# Altium PCB balancer.PcbDoc (part 1 of 2)
Units mil, origin at the board's own origin, x right, y up, seen from the top; angles counter-clockwise.
Board outline 6000 x 4000 mil, 2 copper layers (Top Layer, Bottom Layer); 234 components, 201 nets, 774 pads, 0 vias.
Unrouted connection lines stored in the file: 537.
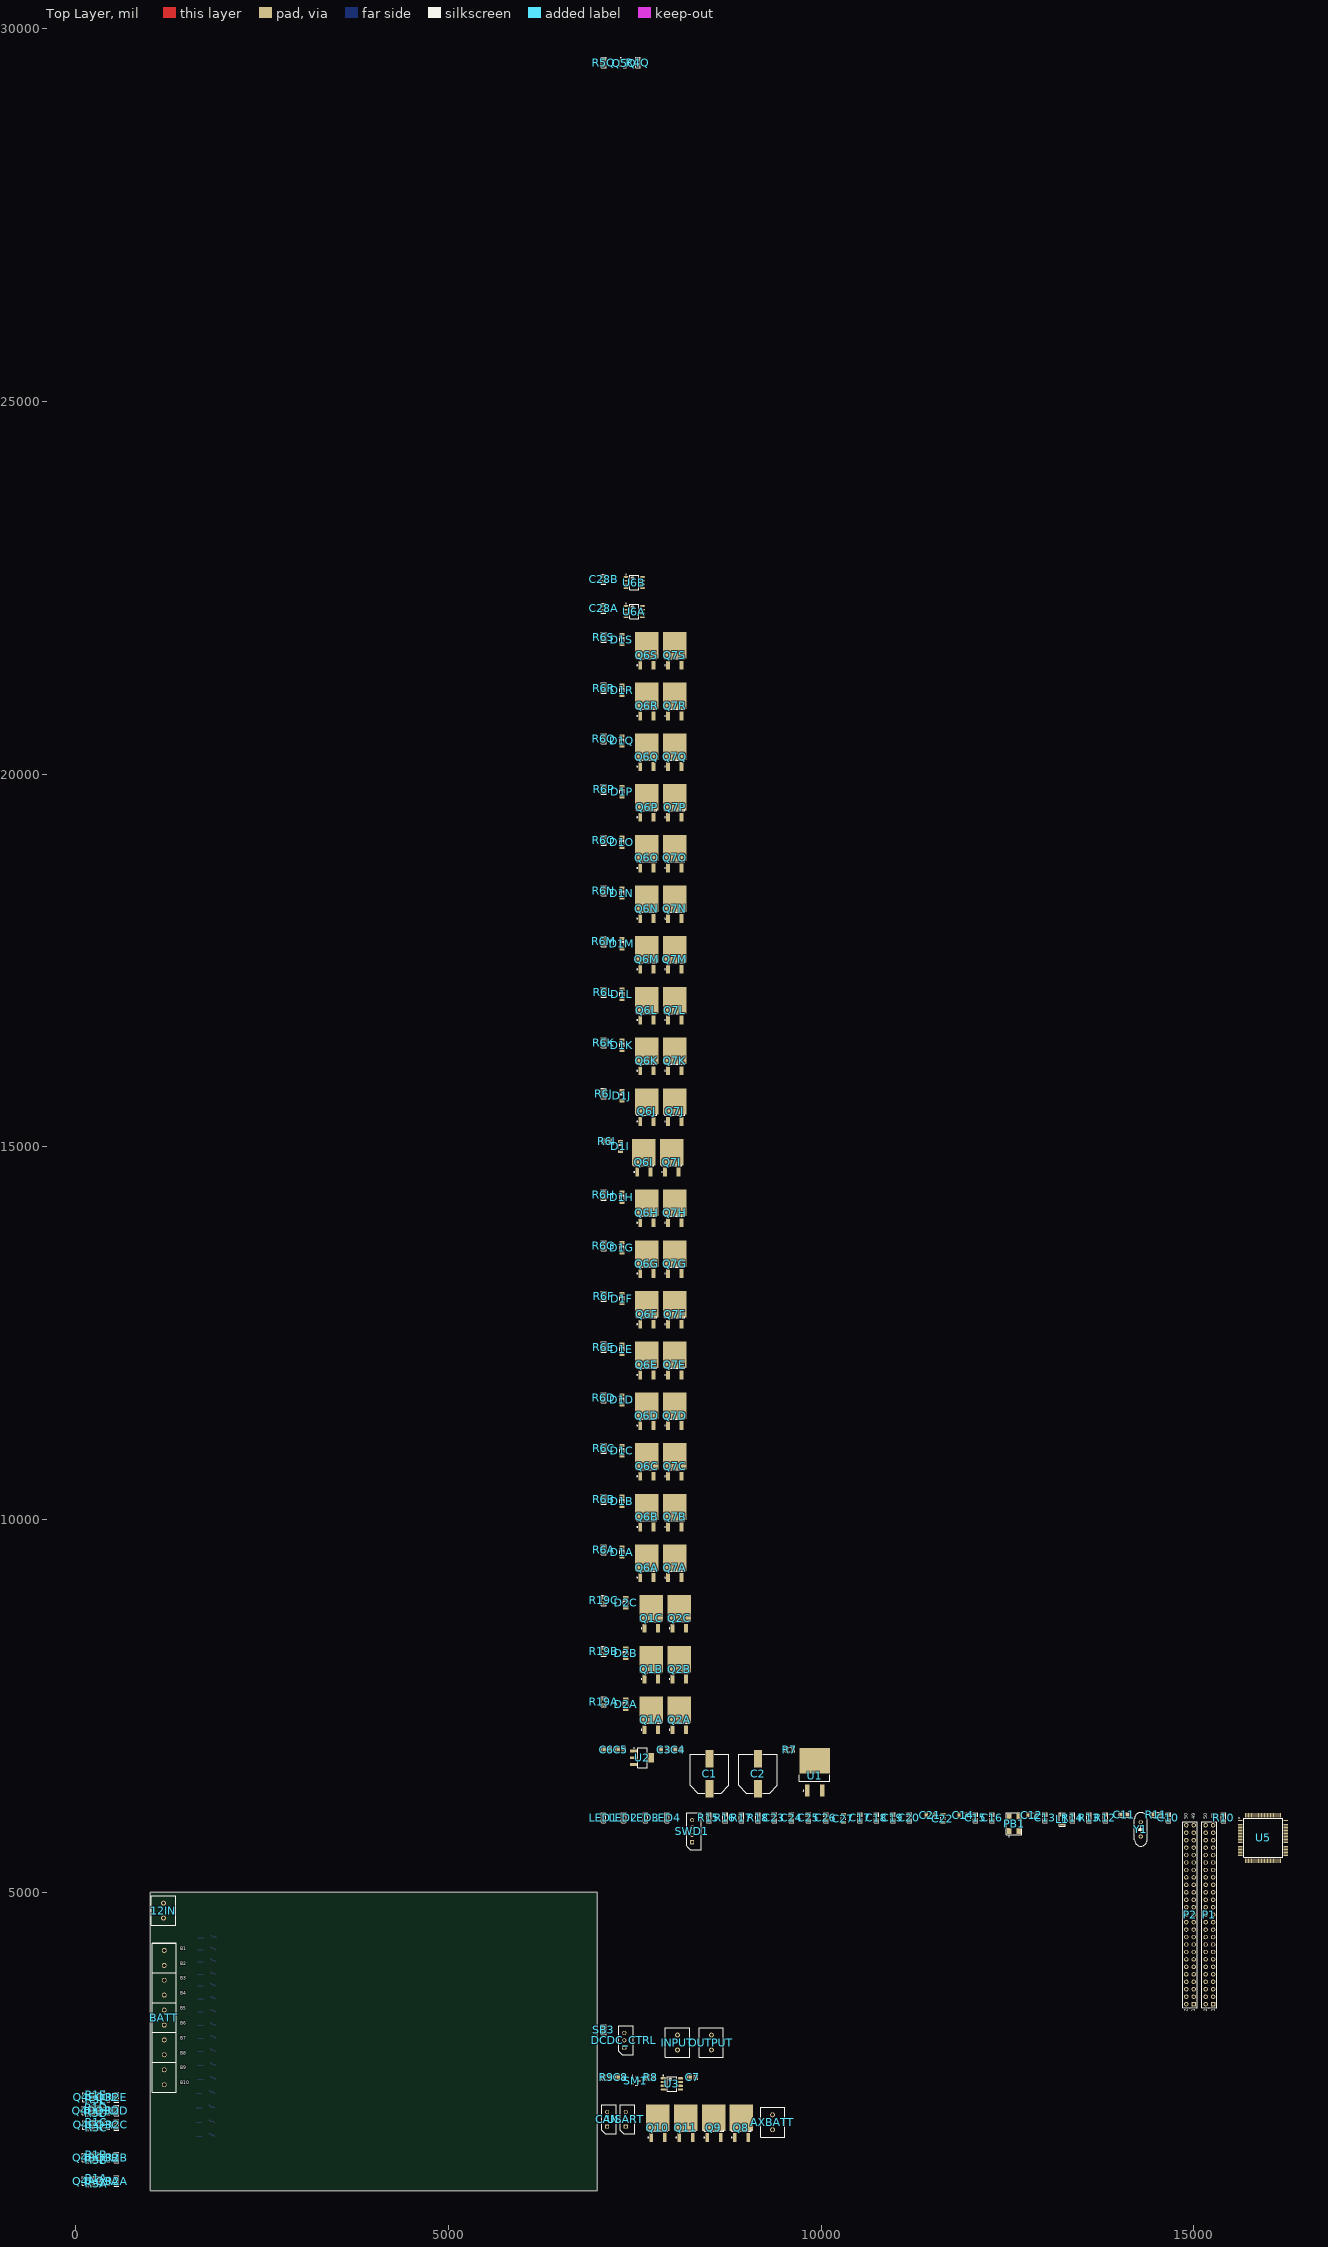
[diagram p0: Top Layer view]
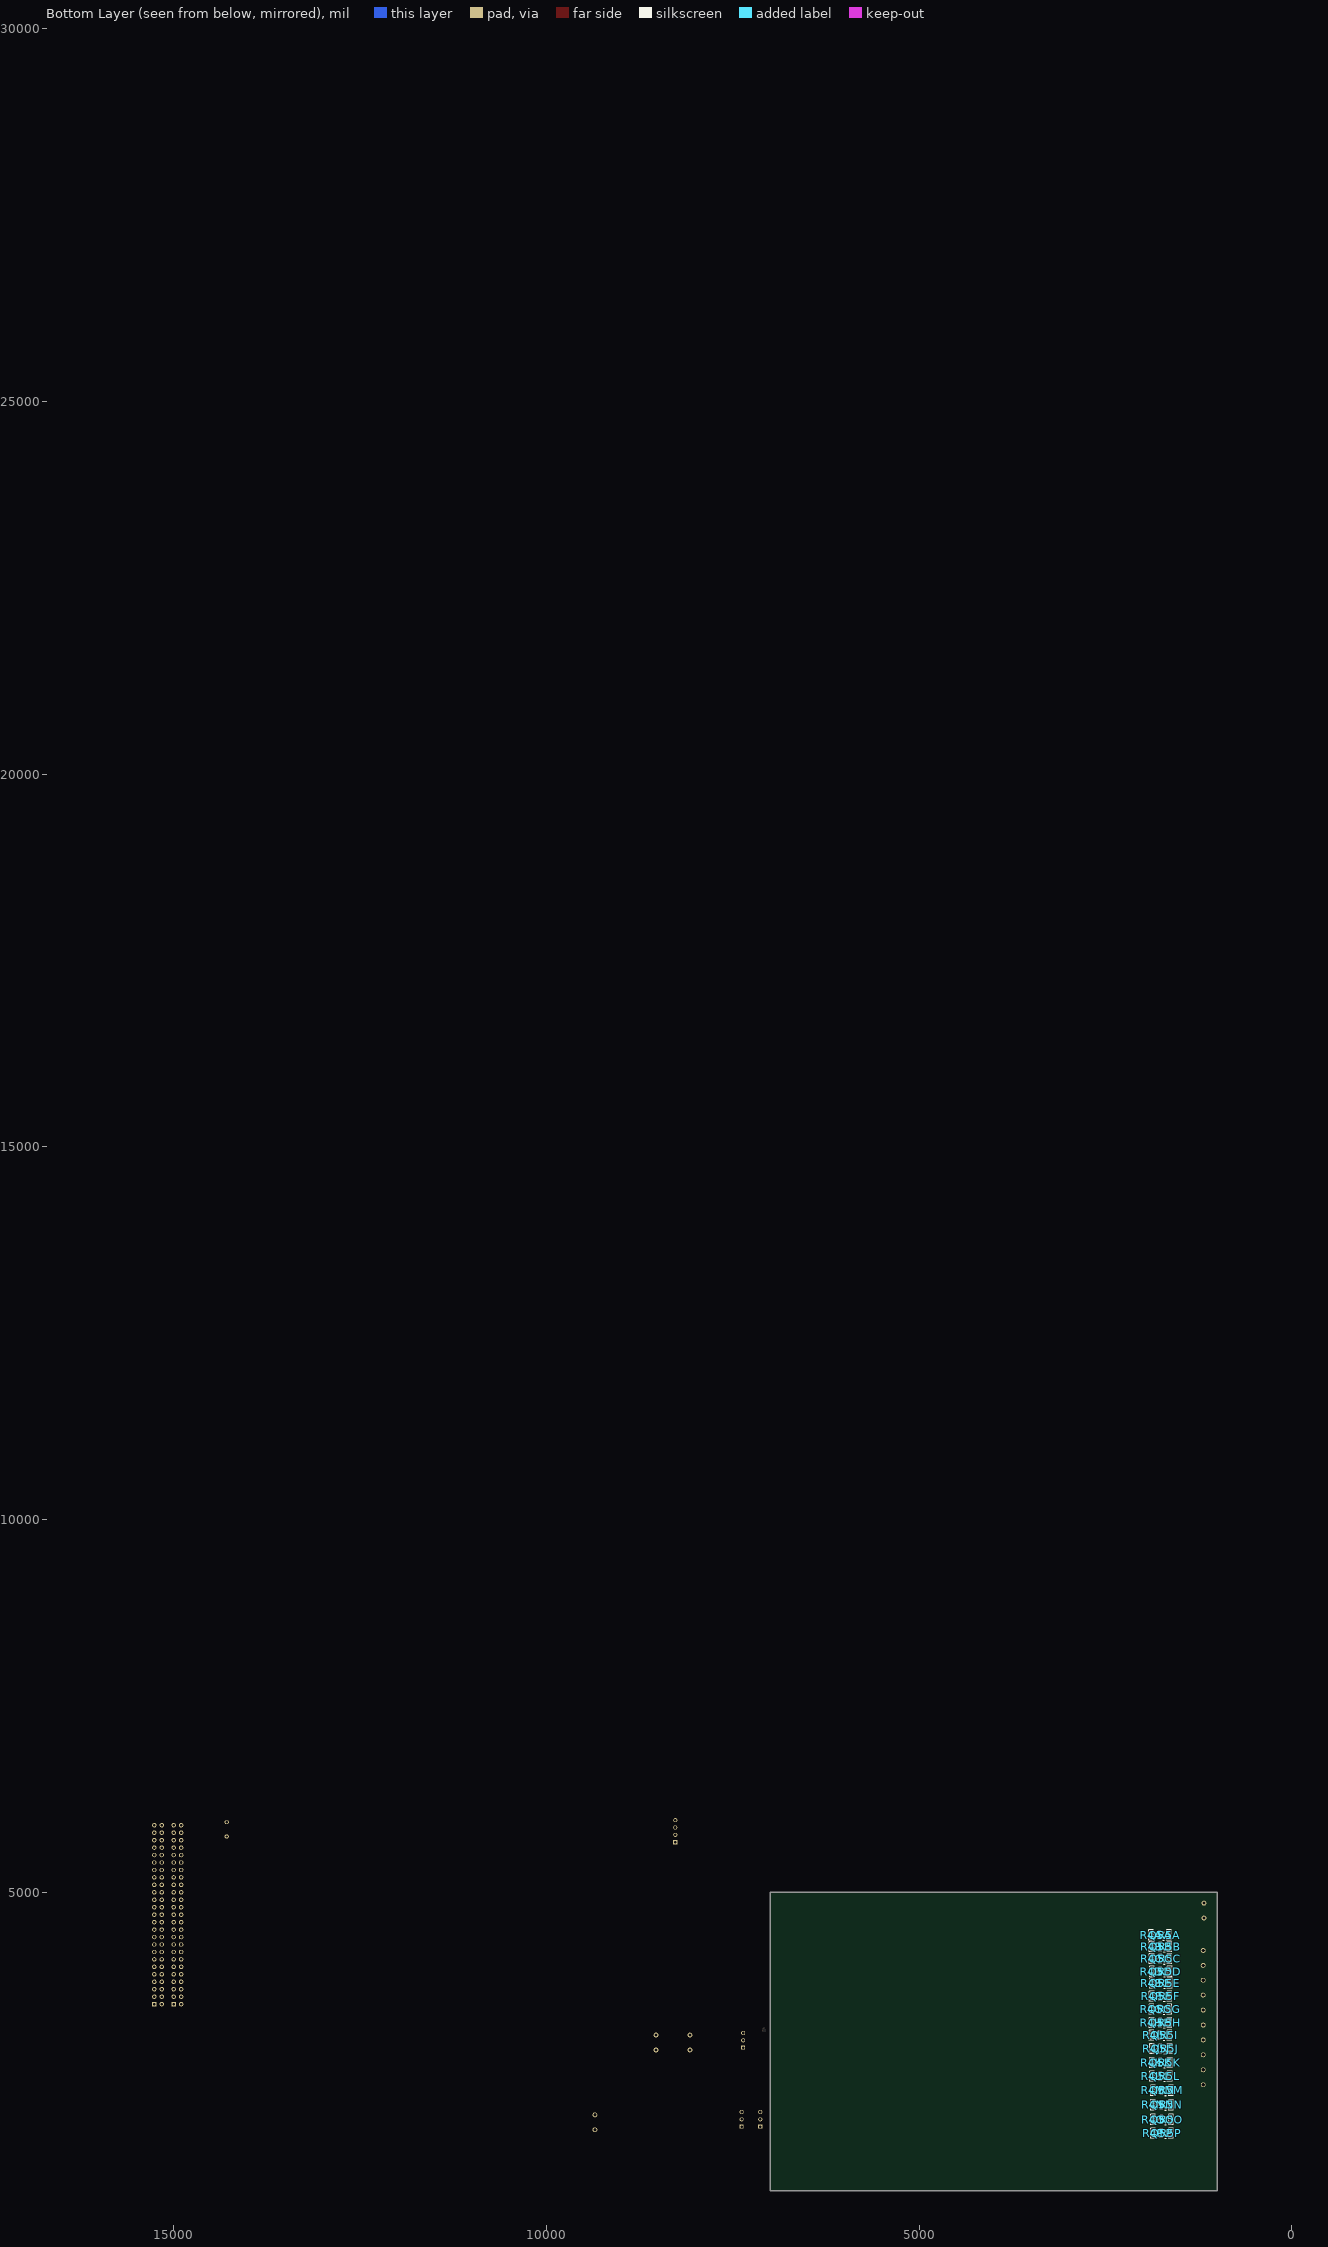
[diagram p1: Bottom Layer view, seen from below]

## Layer stack, top to bottom
Top Solder: solder mask 0.4, Solder Resist, Dk 3.5
Top Layer: signal copper 1.4
Dielectric 1: dielectric 12.6, FR-4, Dk 4.8
Bottom Layer: signal copper 1.4
Bottom Solder: solder mask 0.4, Solder Resist, Dk 3.5

## Board outline
1000,1000 7000,1000 7000,5000 1000,5000

## Design rules (kind name [scope] priority, off if disabled: settings)
Clearance [All] p1: gap=10 ignorepadtopadclearanceinfootprint=FALSE except(0: Arc-Hole Track-Hole SMDPad-Hole THPad-Hole Via-Hole Fill-Hole Poly-Hole Region-Hole Text-Hole)
DiffPairsRouting [All] p1: maxlimit=10 minlimit=10 mostfreqgap=10 toplayer_minwidth=15 toplayer_maxwidth=15 toplayer_prefwidth=15 bottomlayer_minwidth=15 bottomlayer_maxwidth=15 bottomlayer_prefwidth=15 maxuncoupledlength=500
PolygonConnect [All] p1: connectstyle=Relief reliefconductorwidth=10 reliefentries=4 polygonreliefangle="90 Angle" airgapwidth=10
RoomDefinition driver_high_side_neg2 [InComponentClass('driver_high_side_neg2')] p1: confinementstyle=ConfineIn formatcopy=TRUE lockcomponents=FALSE outline 1597.13,4350.5 1597.13,4189.5 1673.86,4189.5 1673.86,4179.29 1847.4,4179.29 1847.4,4189.5 1924.13,4189.5 1924.13,4350.5
RoomDefinition driver_high_side_neg6 [InComponentClass('driver_high_side_neg6')] p2: confinementstyle=ConfineIn formatcopy=TRUE lockcomponents=FALSE outline 1597.13,3687.9 1597.13,3526.9 1673.86,3526.9 1673.86,3516.69 1847.4,3516.69 1847.4,3526.9 1924.13,3526.9 1924.13,3687.9
RoomDefinition driver_high_side_o [InComponentClass('driver_high_side_o')] p3: confinementstyle=ConfineIn formatcopy=TRUE lockcomponents=FALSE outline 1599.37,3512.9 1599.37,3351.9 1676.1,3351.9 1676.1,3341.69 1849.65,3341.69 1849.65,3351.9 1926.37,3351.9 1926.37,3512.9
RoomDefinition driver_high_side_neg3 [InComponentClass('driver_high_side_neg3')] p4: confinementstyle=ConfineIn formatcopy=TRUE lockcomponents=FALSE outline 1597.13,4187.9 1597.13,4026.9 1673.86,4026.9 1673.86,4016.69 1847.4,4016.69 1847.4,4026.9 1924.13,4026.9 1924.13,4187.9
RoomDefinition driver_high_side_neg4 [InComponentClass('driver_high_side_neg4')] p5: confinementstyle=ConfineIn formatcopy=TRUE lockcomponents=FALSE outline 1594.37,4017.9 1594.37,3856.9 1671.1,3856.9 1671.1,3846.69 1844.65,3846.69 1844.65,3856.9 1921.37,3856.9 1921.37,4017.9
RoomDefinition driver_high_side_neg5 [InComponentClass('driver_high_side_neg5')] p6: confinementstyle=ConfineIn formatcopy=TRUE lockcomponents=FALSE outline 1594.37,3862.9 1594.37,3701.9 1671.1,3701.9 1671.1,3691.69 1844.65,3691.69 1844.65,3701.9 1921.37,3701.9 1921.37,3862.9
RoomDefinition driver_high_side_pos16 [InComponentClass('driver_high_side_pos16')] p7: confinementstyle=ConfineIn formatcopy=TRUE lockcomponents=FALSE outline 1579.37,1847.9 1579.37,1686.9 1656.1,1686.9 1656.1,1676.69 1829.65,1676.69 1829.65,1686.9 1906.37,1686.9 1906.37,1847.9
RoomDefinition driver_high_side_pos15 [InComponentClass('driver_high_side_pos15')] p8: confinementstyle=ConfineIn formatcopy=TRUE lockcomponents=FALSE outline 1577.72,2032.9 1577.72,1871.9 1654.45,1871.9 1654.45,1861.69 1827.99,1861.69 1827.99,1871.9 1904.72,1871.9 1904.72,2032.9
RoomDefinition driver_high_side_pos14 [InComponentClass('driver_high_side_pos14')] p9: confinementstyle=ConfineIn formatcopy=TRUE lockcomponents=FALSE outline 1577.72,2227.9 1577.72,2066.9 1654.45,2066.9 1654.45,2056.69 1827.99,2056.69 1827.99,2066.9 1904.72,2066.9 1904.72,2227.9
RoomDefinition driver_high_side_pos13 [InComponentClass('driver_high_side_pos13')] p10: confinementstyle=ConfineIn formatcopy=TRUE lockcomponents=FALSE outline 1577.72,2422.9 1577.72,2261.9 1654.45,2261.9 1654.45,2251.69 1827.99,2251.69 1827.99,2261.9 1904.72,2261.9 1904.72,2422.9
RoomDefinition driver_high_side_pos12 [InComponentClass('driver_high_side_pos12')] p11: confinementstyle=ConfineIn formatcopy=TRUE lockcomponents=FALSE outline 1594.37,2612.9 1594.37,2451.9 1671.1,2451.9 1671.1,2441.69 1844.65,2441.69 1844.65,2451.9 1921.37,2451.9 1921.37,2612.9
RoomDefinition driver_high_side_pos11 [InComponentClass('driver_high_side_pos11')] p12: confinementstyle=ConfineIn formatcopy=TRUE lockcomponents=FALSE outline 1594.37,2796.72 1594.37,2635.72 1671.1,2635.72 1671.1,2625.52 1844.65,2625.52 1844.65,2635.72 1921.37,2635.72 1921.37,2796.72
RoomDefinition driver_high_side_pos10 [InComponentClass('driver_high_side_pos10')] p13: confinementstyle=ConfineIn formatcopy=TRUE lockcomponents=FALSE outline 1594.37,2982.9 1594.37,2821.9 1671.1,2821.9 1671.1,2811.69 1844.65,2811.69 1844.65,2821.9 1921.37,2821.9 1921.37,2982.9
RoomDefinition driver_high_side_pos9 [InComponentClass('driver_high_side_pos9')] p14: confinementstyle=ConfineIn formatcopy=TRUE lockcomponents=FALSE outline 1599.37,3162.9 1599.37,3001.9 1676.1,3001.9 1676.1,2991.69 1849.65,2991.69 1849.65,3001.9 1926.37,3001.9 1926.37,3162.9
RoomDefinition driver_high_side_pos8 [InComponentClass('driver_high_side_pos8')] p15: confinementstyle=ConfineIn formatcopy=TRUE lockcomponents=FALSE outline 1597.13,3332.9 1597.13,3171.9 1673.86,3171.9 1673.86,3161.69 1847.4,3161.69 1847.4,3171.9 1924.13,3171.9 1924.13,3332.9
RoomDefinition driver_high_side_neg1 [InComponentClass('driver_high_side_neg1')] p16: confinementstyle=ConfineIn formatcopy=TRUE lockcomponents=FALSE outline 1604.37,4507.9 1604.37,4346.9 1681.1,4346.9 1681.1,4336.69 1854.65,4336.69 1854.65,4346.9 1931.37,4346.9 1931.37,4507.9
RoomDefinition U_power [InComponentClass('U_power')] p17 off: confinementstyle=ConfineIn formatcopy=TRUE lockcomponents=FALSE outline 7045,6225 10140,6225 10140,7055 7045,7055
RoomDefinition U_MCU [InComponentClass('U_MCU')] p18 off: confinementstyle=ConfineIn formatcopy=TRUE lockcomponents=FALSE outline 7045,3385 16280,3385 16280,6180 7045,6180
RoomDefinition U_DCDC [InComponentClass('U_DCDC')] p19 off: confinementstyle=ConfineIn formatcopy=TRUE lockcomponents=FALSE outline 7045,2715 8740,2715 8740,3335 7045,3335
RoomDefinition U_communication [InComponentClass('U_communication')] p20 off: confinementstyle=ConfineIn formatcopy=TRUE lockcomponents=FALSE outline 7045,2315 8360,2315 8360,2660 7045,2660
RoomDefinition river_high_side_i [InComponentClass('river_high_side_i')] p21 off: confinementstyle=ConfineIn formatcopy=TRUE lockcomponents=FALSE outline 7045,29460 7700,29460 7700,29725 7045,29725
RoomDefinition main2020 [InComponentClass('main2020')] p22 off: confinementstyle=ConfineIn formatcopy=TRUE lockcomponents=FALSE outline 7045,1055 9845,1055 9845,2265 7045,2265
RoomDefinition driver_low_side_pack2ax [InComponentClass('driver_low_side_pack2ax')] p23: confinementstyle=ConfineIn formatcopy=TRUE lockcomponents=FALSE outline 35,2160 35,2330.59 345,2330.59 345,2341.42 518.54,2341.42 518.54,2331.21 595.27,2331.21 595.27,2170.21 208.54,2170.21 208.54,2160
RoomDefinition driver_low_side_neg4 [InComponentClass('driver_low_side_neg4')] p24: confinementstyle=ConfineIn formatcopy=TRUE lockcomponents=FALSE outline 33.23,1981.89 33.23,2152.48 343.23,2152.48 343.23,2163.31 516.77,2163.31 516.77,2153.1 593.5,2153.1 593.5,1992.1 206.77,1992.1 206.77,1981.89
RoomDefinition driver_low_side_neg3 [InComponentClass('driver_low_side_neg3')] p25: confinementstyle=ConfineIn formatcopy=TRUE lockcomponents=FALSE outline 35,1788.58 35,1959.17 345,1959.17 345,1970 518.54,1970 518.54,1959.79 595.27,1959.79 595.27,1798.79 208.54,1798.79 208.54,1788.58
RoomDefinition driver_low_side_neg2 [InComponentClass('driver_low_side_neg2')] p26: confinementstyle=ConfineIn formatcopy=TRUE lockcomponents=FALSE outline 33.23,1351.89 33.23,1522.48 343.23,1522.48 343.23,1533.31 516.77,1533.31 516.77,1523.1 593.5,1523.1 593.5,1362.1 206.77,1362.1 206.77,1351.89
RoomDefinition driver_low_side_DCDC_o [InComponentClass('driver_low_side_DCDC_o')] p27: confinementstyle=ConfineIn formatcopy=TRUE lockcomponents=FALSE outline 33.23,1036.89 33.23,1207.48 343.23,1207.48 343.23,1218.31 516.77,1218.31 516.77,1208.1 593.5,1208.1 593.5,1047.1 206.77,1047.1 206.77,1036.89
RoomDefinition current_sensor_pack [InComponentClass('current_sensor_pack')] p28: confinementstyle=ConfineIn formatcopy=TRUE lockcomponents=FALSE outline 7045,22455 7655,22455 7655,22795 7045,22795
RoomDefinition current_sensor_ax [InComponentClass('current_sensor_ax')] p29: confinementstyle=ConfineIn formatcopy=TRUE lockcomponents=FALSE outline 7045,22065 7655,22065 7655,22405 7045,22405
RoomDefinition bidirectional_switch_pos_P19 [InComponentClass('bidirectional_switch_pos_P19')] p30: confinementstyle=ConfineIn formatcopy=TRUE lockcomponents=FALSE outline 7045,21385 8205,21385 8205,22015 7045,22015
RoomDefinition bidirectional_switch_pos_P18 [InComponentClass('bidirectional_switch_pos_P18')] p31: confinementstyle=ConfineIn formatcopy=TRUE lockcomponents=FALSE outline 7045,20705 8205,20705 8205,21335 7045,21335
RoomDefinition bidirectional_switch_pos_P17 [InComponentClass('bidirectional_switch_pos_P17')] p32: confinementstyle=ConfineIn formatcopy=TRUE lockcomponents=FALSE outline 7045,20025 8205,20025 8205,20655 7045,20655
RoomDefinition bidirectional_switch_pos_P16 [InComponentClass('bidirectional_switch_pos_P16')] p33: confinementstyle=ConfineIn formatcopy=TRUE lockcomponents=FALSE outline 7045,19345 8205,19345 8205,19975 7045,19975
RoomDefinition bidirectional_switch_pos_P15 [InComponentClass('bidirectional_switch_pos_P15')] p34: confinementstyle=ConfineIn formatcopy=TRUE lockcomponents=FALSE outline 7045,18665 8205,18665 8205,19295 7045,19295
RoomDefinition bidirectional_switch_pos_P14 [InComponentClass('bidirectional_switch_pos_P14')] p35: confinementstyle=ConfineIn formatcopy=TRUE lockcomponents=FALSE outline 7045,17985 8205,17985 8205,18615 7045,18615
RoomDefinition bidirectional_switch_pos_P13 [InComponentClass('bidirectional_switch_pos_P13')] p36: confinementstyle=ConfineIn formatcopy=TRUE lockcomponents=FALSE outline 7045,17305 8205,17305 8205,17935 7045,17935
RoomDefinition bidirectional_switch_pos_P12 [InComponentClass('bidirectional_switch_pos_P12')] p37: confinementstyle=ConfineIn formatcopy=TRUE lockcomponents=FALSE outline 7045,16625 8205,16625 8205,17255 7045,17255
RoomDefinition bidirectional_switch_pos_P11 [InComponentClass('bidirectional_switch_pos_P11')] p38: confinementstyle=ConfineIn formatcopy=TRUE lockcomponents=FALSE outline 7045,15945 8205,15945 8205,16575 7045,16575
RoomDefinition bidirectional_switch_pos_DCDC_o [InComponentClass('bidirectional_switch_pos_DCDC_o')] p39: confinementstyle=ConfineIn formatcopy=TRUE lockcomponents=FALSE outline 7045,15265 8205,15265 8205,15895 7045,15895
RoomDefinition bidirectional_switch_pos_DCDC_i [InComponentClass('bidirectional_switch_pos_DCDC_i')] p40: confinementstyle=ConfineIn formatcopy=TRUE lockcomponents=FALSE outline 7045,14585 8165,14585 8165,15215 7045,15215
RoomDefinition bidirectional_switch_pos_AXBATT_o [InComponentClass('bidirectional_switch_pos_AXBATT_o')] p41: confinementstyle=ConfineIn formatcopy=TRUE lockcomponents=FALSE outline 7045,13905 8205,13905 8205,14535 7045,14535
RoomDefinition bidirectional_switch_pos_AXBATT_i [InComponentClass('bidirectional_switch_pos_AXBATT_i')] p42: confinementstyle=ConfineIn formatcopy=TRUE lockcomponents=FALSE outline 7045,13225 8205,13225 8205,13855 7045,13855
RoomDefinition bidirectional_switch_neg_P6 [InComponentClass('bidirectional_switch_neg_P6')] p43: confinementstyle=ConfineIn formatcopy=TRUE lockcomponents=FALSE outline 7045,12545 8205,12545 8205,13175 7045,13175
RoomDefinition bidirectional_switch_neg_P5 [InComponentClass('bidirectional_switch_neg_P5')] p44: confinementstyle=ConfineIn formatcopy=TRUE lockcomponents=FALSE outline 7045,11865 8205,11865 8205,12495 7045,12495
RoomDefinition bidirectional_switch_neg_P4 [InComponentClass('bidirectional_switch_neg_P4')] p45: confinementstyle=ConfineIn formatcopy=TRUE lockcomponents=FALSE outline 7045,11185 8205,11185 8205,11815 7045,11815
RoomDefinition bidirectional_switch_neg_P3 [InComponentClass('bidirectional_switch_neg_P3')] p46: confinementstyle=ConfineIn formatcopy=TRUE lockcomponents=FALSE outline 7045,10505 8205,10505 8205,11135 7045,11135
RoomDefinition bidirectional_switch_neg_P2 [InComponentClass('bidirectional_switch_neg_P2')] p47: confinementstyle=ConfineIn formatcopy=TRUE lockcomponents=FALSE outline 7045,9825 8205,9825 8205,10455 7045,10455
RoomDefinition bidirectional_switch_neg_P1 [InComponentClass('bidirectional_switch_neg_P1')] p48: confinementstyle=ConfineIn formatcopy=TRUE lockcomponents=FALSE outline 7045,9145 8205,9145 8205,9775 7045,9775
RoomDefinition bidirectional_switch_neg_N3 [InComponentClass('bidirectional_switch_neg_N3')] p49: confinementstyle=ConfineIn formatcopy=TRUE lockcomponents=FALSE outline 7045,8465 8265,8465 8265,9095 7045,9095
RoomDefinition bidirectional_switch_neg_N2 [InComponentClass('bidirectional_switch_neg_N2')] p50: confinementstyle=ConfineIn formatcopy=TRUE lockcomponents=FALSE outline 7045,7785 8265,7785 8265,8415 7045,8415
RoomDefinition bidirectional_switch_neg_N1 [InComponentClass('bidirectional_switch_neg_N1')] p51: confinementstyle=ConfineIn formatcopy=TRUE lockcomponents=FALSE outline 7045,7105 8265,7105 8265,7735 7045,7735
RoutingVias [All] p1: holewidth=28 width=50 viastyle="Through Hole" minholewidth=28 minwidth=50 maxholewidth=28 maxwidth=50
SolderMaskExpansion [All] p1: expansion=4
Width [All] p1: maxlimit=10 minlimit=10 preferedwidth=10
29 further rules are at their usual default settings.

## Classes and differential pairs
channel class driver_low_side: driver_low_side_DCDC_o driver_low_side_neg2 driver_low_side_neg3 driver_low_side_neg4 driver_low_side_pack2ax
channel class driver_high_side: driver_high_side_neg1 driver_high_side_neg2 driver_high_side_neg3 driver_high_side_neg4 driver_high_side_neg5 driver_high_side_neg6 driver_high_side_o driver_high_side_pos8 driver_high_side_pos9 driver_high_side_pos10 driver_high_side_pos11 driver_high_side_pos12 driver_high_side_pos13 driver_high_side_pos14 driver_high_side_pos15 driver_high_side_pos16 river_high_side_i
channel class current_sensor: current_sensor_ax current_sensor_pack
channel class bidirectional_switch_N: bidirectional_switch_neg_N1 bidirectional_switch_neg_N2 bidirectional_switch_neg_N3
channel class bidirectional_switch: bidirectional_switch_neg_P1 bidirectional_switch_neg_P2 bidirectional_switch_neg_P3 bidirectional_switch_neg_P4 bidirectional_switch_neg_P5 bidirectional_switch_neg_P6 bidirectional_switch_pos_AXBATT_i bidirectional_switch_pos_AXBATT_o bidirectional_switch_pos_DCDC_i bidirectional_switch_pos_DCDC_o bidirectional_switch_pos_P11 bidirectional_switch_pos_P12 bidirectional_switch_pos_P13 bidirectional_switch_pos_P14 bidirectional_switch_pos_P15 bidirectional_switch_pos_P16 bidirectional_switch_pos_P17 bidirectional_switch_pos_P18 bidirectional_switch_pos_P19
net class trig_pos_[1..9]: trig_pos_1 trig_pos_2 trig_pos_3 trig_pos_4 trig_pos_5 trig_pos_6 trig_pos_7 trig_pos_8 trig_pos_9
net class trig_neg_[2..10]: trig_neg_2 trig_neg_3 trig_neg_4 trig_neg_5 trig_neg_6 trig_neg_7 trig_neg_8 trig_neg_9 trig_neg_10
net class M1_[1..10]: M1_1 M1_2 M1_3 M1_4 M1_5 M1_6 M1_7 M1_8 M1_9 M1_10
net class G_pos_o[1..9]: G_pos_o1 G_pos_o2 G_pos_o3 G_pos_o4 G_pos_o5 G_pos_o6 G_pos_o7 G_pos_o8 G_pos_o9
net class G_neg_oN_[8..10]: G_neg_oN_8 G_neg_oN_9 G_neg_oN_10
net class G_neg_o_[2..7]: G_neg_o_2 G_neg_o_3 G_neg_o_4 G_neg_o_5 G_neg_o_6 G_neg_o_7
component class U_power: 12IN C1 C2 C3 C4 C5 C6 R7 U1 U2
component class U_MCU: C10 C11 C12 C13 C14 C15 C16 C17 C18 C19 C20 C21 C22 C23 C24 C25 C26 C27 L1 LED1 LED2 LED3 LED4 P1 P2 PB1 R10 R11 R12 R13 R14 R15 R16 R17 R18 SWD1 U5 Y1
component class U_DCDC: DCDC_CTRL INPUT OUTPUT SB3
component class U_communication: C7 C8 R8 R9 SM1 U3
component class river_high_side_i: Q5Q R4Q R5Q
component class main2020: AXBATT BATT CAN Q8 Q9 Q10 Q11 USART
component class driver_low_side_pack2ax: Q3E Q4E R1E R2E R3E
component class driver_low_side_neg4: Q3D Q4D R1D R2D R3D
component class driver_low_side_neg3: Q3C Q4C R1C R2C R3C
component class driver_low_side_neg2: Q3B Q4B R1B R2B R3B
component class driver_low_side_DCDC_o: Q3A Q4A R1A R2A R3A
component class driver_high_side_pos16: Q5P R4P R5P
component class driver_high_side_pos15: Q5O R4O R5O
component class driver_high_side_pos14: Q5N R4N R5N
component class driver_high_side_pos13: Q5M R4M R5M
component class driver_high_side_pos12: Q5L R4L R5L
component class driver_high_side_pos11: Q5K R4K R5K
component class driver_high_side_pos10: Q5J R4J R5J
component class driver_high_side_pos9: Q5I R4I R5I
component class driver_high_side_pos8: Q5H R4H R5H
component class driver_high_side_o: Q5G R4G R5G
component class driver_high_side_neg6: Q5F R4F R5F
component class driver_high_side_neg5: Q5E R4E R5E
component class driver_high_side_neg4: Q5D R4D R5D
component class driver_high_side_neg3: Q5C R4C R5C
component class driver_high_side_neg2: Q5B R4B R5B
component class driver_high_side_neg1: Q5A R4A R5A
component class current_sensor_pack: C28B U6B
component class current_sensor_ax: C28A U6A
component class bidirectional_switch_pos_P19: D1S Q6S Q7S R6S
component class bidirectional_switch_pos_P18: D1R Q6R Q7R R6R
component class bidirectional_switch_pos_P17: D1Q Q6Q Q7Q R6Q
component class bidirectional_switch_pos_P16: D1P Q6P Q7P R6P
component class bidirectional_switch_pos_P15: D1O Q6O Q7O R6O
component class bidirectional_switch_pos_P14: D1N Q6N Q7N R6N
component class bidirectional_switch_pos_P13: D1M Q6M Q7M R6M
component class bidirectional_switch_pos_P12: D1L Q6L Q7L R6L
component class bidirectional_switch_pos_P11: D1K Q6K Q7K R6K
component class bidirectional_switch_pos_DCDC_o: D1J Q6J Q7J R6J
component class bidirectional_switch_pos_DCDC_i: D1I Q6I Q7I R6I
component class bidirectional_switch_pos_AXBATT_o: D1H Q6H Q7H R6H
component class bidirectional_switch_pos_AXBATT_i: D1G Q6G Q7G R6G
component class bidirectional_switch_neg_P6: D1F Q6F Q7F R6F
component class bidirectional_switch_neg_P5: D1E Q6E Q7E R6E
component class bidirectional_switch_neg_P4: D1D Q6D Q7D R6D
component class bidirectional_switch_neg_P3: D1C Q6C Q7C R6C
component class bidirectional_switch_neg_P2: D1B Q6B Q7B R6B
component class bidirectional_switch_neg_P1: D1A Q6A Q7A R6A
component class bidirectional_switch_neg_N3: D2C Q1C Q2C R19C
component class bidirectional_switch_neg_N2: D2B Q1B Q2B R19B
component class bidirectional_switch_neg_N1: D2A Q1A Q2A R19A
differential pair CAN: +CAN_P -CAN_N

## Components (designator, comment, footprint, x,y, rotation, side; value= is the part's Value field where it differs from the comment)
12IN "CONN_TB8" "terminal block - 2828372" 1180,4655 r90 top (schematic designator J1)
AXBATT "CONN_TB8" 2828372 9350,1815 r90 top
BATT "LI-ION BATTRY" "terminal block - battery - 2828372 -" 1190.4,3321.18 r180 top
C1 "220uF" CAPAE220uF-63V 8505,6590 r90 top
C2 "220uF" CAPAE220uF-63V 9155,6590 r90 top
C3 "100nF" CAPC0603 7895,6915 r0 top
C4 "100nF" CAPC0603 8085,6915 r0 top
C5 "100nF" CAPC0603 7315,6915 r0 top
C6 "100nF" CAPC0603 7125,6915 r0 top
C7 "100nF" CAPC0603 8280,2520 r0 top
C8 "1nF" CAPC0603 7315,2520 r0 top
C10 "20pF" CAPC0603 14660,6000 r90 top
C11 "20pF" CAPC0603 14070,6040 r0 top
C12 "2.2uF" C1206 12830,6035 r0 top
C13 "100nF" CAPC0603 13005,6000 r90 top
C14 "2.2uF" C1206 11905,6035 r0 top
C15 "100nF" CAPC0603 12075,6000 r90 top
C16 "100nF" CAPC0603 12295,6000 r90 top
C17 "100nF" CAPC0603 10525,6000 r90 top
C18 "100nF" CAPC0603 10745,6000 r90 top
C19 "100nF" CAPC0603 10965,6000 r90 top
C20 "100nF" CAPC0603 11185,6000 r90 top
C21 "2.2uF" C1206 11465,6035 r0 top
C22 "2.2uF" C1206 11635,5990 r90 top
C23 "100nF" CAPC0603 9375,6000 r90 top
C24 "100nF" CAPC0603 9605,6000 r90 top
C25 "100nF" CAPC0603 9835,6000 r90 top
C26 "100nF" CAPC0603 10065,6000 r90 top
C27 "2.2uF" C1206 10300,5990 r90 top
C28A "100nF" CAPC0603 7085,22225 r90 top (schematic designator C28)
C28B "100nF" CAPC0603 7085,22615 r90 top (schematic designator C28)
CAN "DCDC_CTRL" HEADER1*3 7155,1955 r90 top
D1A "Zener" ZENER 7330,9565 r90 top (schematic designator D1)
D1B "Zener" ZENER 7330,10245 r90 top (schematic designator D1)
D1C "Zener" ZENER 7330,10925 r90 top (schematic designator D1)
D1D "Zener" ZENER 7330,11605 r90 top (schematic designator D1)
D1E "Zener" ZENER 7330,12285 r90 top (schematic designator D1)
D1F "Zener" ZENER 7330,12965 r90 top (schematic designator D1)
D1G "Zener" ZENER 7330,13645 r90 top (schematic designator D1)
D1H "Zener" ZENER 7330,14325 r90 top (schematic designator D1)
D1I "Zener" ZENER 7310,15005 r90 top (schematic designator D1)
D1J "Zener" ZENER 7330,15685 r90 top (schematic designator D1)
D1K "Zener" ZENER 7330,16365 r90 top (schematic designator D1)
D1L "Zener" ZENER 7330,17045 r90 top (schematic designator D1)
D1M "Zener" ZENER 7330,17725 r90 top (schematic designator D1)
D1N "Zener" ZENER 7330,18405 r90 top (schematic designator D1)
D1O "Zener" ZENER 7330,19085 r90 top (schematic designator D1)
D1P "Zener" ZENER 7330,19765 r90 top (schematic designator D1)
D1Q "Zener" ZENER 7330,20445 r90 top (schematic designator D1)
D1R "Zener" ZENER 7330,21125 r90 top (schematic designator D1)
D1S "Zener" ZENER 7330,21805 r90 top (schematic designator D1)
D2A "Zener" ZENER 7380,7525 r90 top (schematic designator D2)
D2B "Zener" ZENER 7380,8205 r90 top (schematic designator D2)
D2C "Zener" ZENER 7380,8885 r90 top (schematic designator D2)
DCDC_CTRL "DCDC_CTRL" HEADER1*3 7385,3015 r90 top
INPUT "CONN_TB8" "terminal block - 2828372" 8075,2885 r90 top
L1 "100uH" RES1206 13235,5980 r90 top value=68uH
LED1 "Red" LED 7085,6000 r90 top
LED2 "Red" LED 7355,6000 r90 top
LED3 "Red" LED 7645,6000 r90 top
LED4 "Red" LED 7935,6000 r90 top
OUTPUT "CONN_TB8" "terminal block - 2828372" 8530,2885 r90 top
P1 "Header 25X2" HDR2X25 15260,3500 r90 top
P2 "Header 25X2" HDR2X25 15000,3500 r90 top
PB1 "Reset" SWITCH-PB4 12590,5920 r0 top
Q1A "NMOS-2" dpak 7735,7445 r90 top (schematic designator Q1)
Q1B "NMOS-2" dpak 7735,8125 r90 top (schematic designator Q1)
Q1C "NMOS-2" dpak 7735,8805 r90 top (schematic designator Q1)
Q2A "NMOS-2" dpak 8110,7445 r90 top (schematic designator Q2)
Q2B "NMOS-2" dpak 8110,8125 r90 top (schematic designator Q2)
Q2C "NMOS-2" dpak 8110,8805 r90 top (schematic designator Q2)
Q3A "PNP" NPN 430,1127.6 r0 top (schematic designator Q3)
Q3B "PNP" NPN 430,1442.6 r0 top (schematic designator Q3)
Q3C "PNP" NPN 431.77,1879.29 r0 top (schematic designator Q3)
Q3D "PNP" NPN 430,2072.6 r0 top (schematic designator Q3)
Q3E "PNP" NPN 431.77,2250.71 r0 top (schematic designator Q3)
Q4A "NPN transistor" NPN 120,1127.6 r180 top (schematic designator Q4)
Q4B "NPN transistor" NPN 120,1442.6 r180 top (schematic designator Q4)
Q4C "NPN transistor" NPN 121.77,1879.29 r180 top (schematic designator Q4)
Q4D "NPN transistor" NPN 120,2072.6 r180 top (schematic designator Q4)
Q4E "NPN transistor" NPN 121.77,2250.71 r180 top (schematic designator Q4)
Q5A "NPN transistor" NPN 1767.87,4427.4 r0 bottom (schematic designator Q5)
Q5B "NPN transistor" NPN 1760.63,4270 r0 bottom (schematic designator Q5)
Q5C "NPN transistor" NPN 1760.63,4107.4 r0 bottom (schematic designator Q5)
Q5D "NPN transistor" NPN 1757.87,3937.4 r0 bottom (schematic designator Q5)
Q5E "NPN transistor" NPN 1757.87,3782.4 r0 bottom (schematic designator Q5)
Q5F "NPN transistor" NPN 1760.63,3607.4 r0 bottom (schematic designator Q5)
Q5G "NPN transistor" NPN 1762.87,3432.4 r0 bottom (schematic designator Q5)
Q5H "NPN transistor" NPN 1760.63,3252.4 r0 bottom (schematic designator Q5)
Q5I "NPN transistor" NPN 1762.87,3082.4 r0 bottom (schematic designator Q5)
Q5J "NPN transistor" NPN 1757.87,2902.4 r0 bottom (schematic designator Q5)
Q5K "NPN transistor" NPN 1757.87,2716.22 r0 bottom (schematic designator Q5)
Q5L "NPN transistor" NPN 1757.87,2532.4 r0 bottom (schematic designator Q5)
Q5M "NPN transistor" NPN 1741.22,2342.4 r0 bottom (schematic designator Q5)
Q5N "NPN transistor" NPN 1741.22,2147.4 r0 bottom (schematic designator Q5)
Q5O "NPN transistor" NPN 1741.22,1952.4 r0 bottom (schematic designator Q5)
Q5P "NPN transistor" NPN 1742.87,1767.4 r0 bottom (schematic designator Q5)
Q5Q "NPN transistor" NPN 7360,29535 r0 top (schematic designator Q5)
Q6A "P_Mosfet IRF5305" dpak 7675,9485 r90 top (schematic designator Q6)
Q6B "P_Mosfet IRF5305" dpak 7675,10165 r90 top (schematic designator Q6)
Q6C "P_Mosfet IRF5305" dpak 7675,10845 r90 top (schematic designator Q6)
Q6D "P_Mosfet IRF5305" dpak 7675,11525 r90 top (schematic designator Q6)
Q6E "P_Mosfet IRF5305" dpak 7675,12205 r90 top (schematic designator Q6)
Q6F "P_Mosfet IRF5305" dpak 7675,12885 r90 top (schematic designator Q6)
Q6G "P_Mosfet IRF5305" dpak 7675,13565 r90 top (schematic designator Q6)
Q6H "P_Mosfet IRF5305" dpak 7675,14245 r90 top (schematic designator Q6)
Q6I "P_Mosfet IRF5305" dpak 7635,14925 r90 top (schematic designator Q6)
Q6J "P_Mosfet IRF5305" dpak 7675,15605 r90 top (schematic designator Q6)
Q6K "P_Mosfet IRF5305" dpak 7675,16285 r90 top (schematic designator Q6)
Q6L "P_Mosfet IRF5305" dpak 7675,16965 r90 top (schematic designator Q6)
Q6M "P_Mosfet IRF5305" dpak 7675,17645 r90 top (schematic designator Q6)
Q6N "P_Mosfet IRF5305" dpak 7675,18325 r90 top (schematic designator Q6)
Q6O "P_Mosfet IRF5305" dpak 7675,19005 r90 top (schematic designator Q6)
Q6P "P_Mosfet IRF5305" dpak 7675,19685 r90 top (schematic designator Q6)
Q6Q "P_Mosfet IRF5305" dpak 7675,20365 r90 top (schematic designator Q6)
Q6R "P_Mosfet IRF5305" dpak 7675,21045 r90 top (schematic designator Q6)
Q6S "P_Mosfet IRF5305" dpak 7675,21725 r90 top (schematic designator Q6)
Q7A "P_Mosfet IRF5305" dpak 8050,9485 r90 top (schematic designator Q7)
Q7B "P_Mosfet IRF5305" dpak 8050,10165 r90 top (schematic designator Q7)
Q7C "P_Mosfet IRF5305" dpak 8050,10845 r90 top (schematic designator Q7)
Q7D "P_Mosfet IRF5305" dpak 8050,11525 r90 top (schematic designator Q7)
Q7E "P_Mosfet IRF5305" dpak 8050,12205 r90 top (schematic designator Q7)
Q7F "P_Mosfet IRF5305" dpak 8050,12885 r90 top (schematic designator Q7)
Q7G "P_Mosfet IRF5305" dpak 8050,13565 r90 top (schematic designator Q7)
Q7H "P_Mosfet IRF5305" dpak 8050,14245 r90 top (schematic designator Q7)
Q7I "P_Mosfet IRF5305" dpak 8010,14925 r90 top (schematic designator Q7)
Q7J "P_Mosfet IRF5305" dpak 8050,15605 r90 top (schematic designator Q7)
Q7K "P_Mosfet IRF5305" dpak 8050,16285 r90 top (schematic designator Q7)
Q7L "P_Mosfet IRF5305" dpak 8050,16965 r90 top (schematic designator Q7)
Q7M "P_Mosfet IRF5305" dpak 8050,17645 r90 top (schematic designator Q7)
Q7N "P_Mosfet IRF5305" dpak 8050,18325 r90 top (schematic designator Q7)
Q7O "P_Mosfet IRF5305" dpak 8050,19005 r90 top (schematic designator Q7)
Q7P "P_Mosfet IRF5305" dpak 8050,19685 r90 top (schematic designator Q7)
Q7Q "P_Mosfet IRF5305" dpak 8050,20365 r90 top (schematic designator Q7)
Q7R "P_Mosfet IRF5305" dpak 8050,21045 r90 top (schematic designator Q7)
Q7S "P_Mosfet IRF5305" dpak 8050,21725 r90 top (schematic designator Q7)
Q8 "NMOS-2" dpak 8945,1975 r90 top
Q9 "NMOS-2" dpak 8575,1975 r90 top
Q10 "NMOS-2" dpak 7825,1975 r90 top
Q11 "NMOS-2" dpak 8200,1975 r90 top
R1A "1K" RESC0603 275,1162.6 r0 top (schematic designator R1)
R1B "1K" RESC0603 275,1477.6 r0 top (schematic designator R1)
R1C "1K" RESC0603 276.77,1914.29 r0 top (schematic designator R1)
R1D "1K" RESC0603 275,2107.6 r0 top (schematic designator R1)
R1E "1K" RESC0603 276.77,2285.71 r0 top (schematic designator R1)
R2A "10" RESC0603 550,1127.6 r90 top (schematic designator R2)
R2B "10" RESC0603 550,1442.6 r90 top (schematic designator R2)
R2C "10" RESC0603 551.77,1879.29 r90 top (schematic designator R2)
R2D "10" RESC0603 550,2072.6 r90 top (schematic designator R2)
R2E "10" RESC0603 551.77,2250.71 r90 top (schematic designator R2)
R3A "10K" RESC0603 275,1092.6 r180 top (schematic designator R3)
R3B "10K" RESC0603 275,1407.6 r180 top (schematic designator R3)
R3C "10K" RESC0603 276.77,1844.29 r180 top (schematic designator R3)
R3D "10K" RESC0603 275,2037.6 r180 top (schematic designator R3)
R3E "10K" RESC0603 276.77,2215.71 r180 top (schematic designator R3)
R4A "10" RESC0603 1887.87,4427.4 r270 bottom (schematic designator R4)
R4B "10" RESC0603 1880.63,4270 r270 bottom (schematic designator R4)
R4C "10" RESC0603 1880.63,4107.4 r270 bottom (schematic designator R4)
R4D "10" RESC0603 1877.87,3937.4 r270 bottom (schematic designator R4)
R4E "10" RESC0603 1877.87,3782.4 r270 bottom (schematic designator R4)
R4F "10" RESC0603 1880.63,3607.4 r270 bottom (schematic designator R4)
R4G "10" RESC0603 1882.87,3432.4 r270 bottom (schematic designator R4)
R4H "10" RESC0603 1880.63,3252.4 r270 bottom (schematic designator R4)
R4I "10" RESC0603 1882.87,3082.4 r270 bottom (schematic designator R4)
R4J "10" RESC0603 1877.87,2902.4 r270 bottom (schematic designator R4)
R4K "10" RESC0603 1877.87,2716.22 r270 bottom (schematic designator R4)
R4L "10" RESC0603 1877.87,2532.4 r270 bottom (schematic designator R4)
R4M "10" RESC0603 1861.22,2342.4 r270 bottom (schematic designator R4)
R4N "10" RESC0603 1861.22,2147.4 r270 bottom (schematic designator R4)
R4O "10" RESC0603 1861.22,1952.4 r270 bottom (schematic designator R4)
R4P "10" RESC0603 1862.87,1767.4 r270 bottom (schematic designator R4)
R4Q "10" RESC0603 7545,29545 r90 top (schematic designator R4)
R5A "10K" RESC0603 1647.87,4427.4 r270 bottom (schematic designator R5)
R5B "10K" RESC0603 1640.63,4270 r270 bottom (schematic designator R5)
R5C "10K" RESC0603 1640.63,4107.4 r270 bottom (schematic designator R5)
R5D "10K" RESC0603 1637.87,3937.4 r270 bottom (schematic designator R5)
R5E "10K" RESC0603 1637.87,3782.4 r270 bottom (schematic designator R5)
R5F "10K" RESC0603 1640.63,3607.4 r270 bottom (schematic designator R5)
R5G "10K" RESC0603 1642.87,3432.4 r270 bottom (schematic designator R5)
R5H "10K" RESC0603 1640.63,3252.4 r270 bottom (schematic designator R5)
R5I "10K" RESC0603 1642.87,3082.4 r270 bottom (schematic designator R5)
R5J "10K" RESC0603 1637.87,2902.4 r270 bottom (schematic designator R5)
R5K "10K" RESC0603 1637.87,2716.22 r270 bottom (schematic designator R5)
R5L "10K" RESC0603 1637.87,2532.4 r270 bottom (schematic designator R5)
R5M "10K" RESC0603 1621.22,2342.4 r270 bottom (schematic designator R5)
R5N "10K" RESC0603 1621.22,2147.4 r270 bottom (schematic designator R5)
R5O "10K" RESC0603 1621.22,1952.4 r270 bottom (schematic designator R5)
R5P "10K" RESC0603 1622.87,1767.4 r270 bottom (schematic designator R5)
R5Q "10K" RESC0603 7085,29545 r90 top (schematic designator R5)
R6A "1K" RESC0603 7085,9595 r90 top (schematic designator R6)
R6B "1K" RESC0603 7085,10275 r90 top (schematic designator R6)
R6C "1K" RESC0603 7085,10955 r90 top (schematic designator R6)
R6D "1K" RESC0603 7085,11635 r90 top (schematic designator R6)
R6E "1K" RESC0603 7085,12315 r90 top (schematic designator R6)
R6F "1K" RESC0603 7085,12995 r90 top (schematic designator R6)
R6G "1K" RESC0603 7085,13675 r90 top (schematic designator R6)
R6H "1K" RESC0603 7085,14355 r90 top (schematic designator R6)
R6I "1K" RESC0603 7125,15075 r0 top (schematic designator R6)
R6J "1K" RESC0603 7085,15715 r90 top (schematic designator R6)
R6K "1K" RESC0603 7085,16395 r90 top (schematic designator R6)
R6L "1K" RESC0603 7085,17075 r90 top (schematic designator R6)
R6M "1K" RESC0603 7085,17755 r90 top (schematic designator R6)
R6N "1K" RESC0603 7085,18435 r90 top (schematic designator R6)
R6O "1K" RESC0603 7085,19115 r90 top (schematic designator R6)
R6P "1K" RESC0603 7085,19795 r90 top (schematic designator R6)
R6Q "1K" RESC0603 7085,20475 r90 top (schematic designator R6)
R6R "1K" RESC0603 7085,21155 r90 top (schematic designator R6)
R6S "1K" RESC0603 7085,21835 r90 top (schematic designator R6)
R7 "0" RESC0603 9580,6915 r0 top
R8 "60" RESC0603 7715,2520 r0 top
R9 "60" RESC0603 7125,2520 r0 top
R10 "10K" RESC0603 15400,6000 r90 top
R11 "0" RESC0603 14500,6040 r0 top
R12 "10K" RESC0603 13815,6000 r90 top
R13 "10K" RESC0603 13595,6000 r90 top
R14 "47" RESC0603 13375,6000 r90 top
R15 "10K" RESC0603 8495,6000 r90 top
R16 "10K" RESC0603 8715,6000 r90 top
R17 "10K" RESC0603 8935,6000 r90 top
R18 "10K" RESC0603 9155,6000 r90 top
R19A "1K" RESC0603 7085,7555 r90 top (schematic designator R19)
R19B "1K" RESC0603 7085,8235 r90 top (schematic designator R19)
R19C "1K" RESC0603 7085,8915 r90 top (schematic designator R19)
SB3 "Solder Bridge ON" "RES 0R" 7085,3155 r90 top
SM1 "ESDCAN05-2BLY" SOT-23_N 7515,2470 r0 top
SWD1 "" HEADER1*4 8295,5820 r90 top
U1 "LM7805" D2PAK 9915,6610 r90 top
U2 "AMS1117 3.3" AMS1117 7605,6805 r0 top
U3 "TJA1051T" LM358 8000,2430 r0 top
U5 "STM32F407VGT6" QFP50P1600X1600X160-100N 15930,5730 r0 top
U6A "ACS712" ACS712 7495,22180 r0 top (schematic designator U6)
U6B "ACS712" ACS712 7495,22570 r0 top (schematic designator U6)
USART "DCDC_CTRL" HEADER1*3 7405,1955 r90 top
Y1 "XTAL" XTAL 14290,5845 r0 top

## Footprints (in the part's own frame and the unit in brackets; to place one, negate y for a bottom-side part, rotate by r counter-clockwise, add the part's x,y. Pads: shape width x height; smd on the part's side, far side on the other; paste and mask are expansions set on the pad)
2828372 [mm] "terminal block 2 pin"
  round 1.65 hole 1.1: 1(0,0) 2(5.08,0)
  silkscreen extent -2.54,-4.1 7.62,4.1, body extent -2.51,-4.11 8.25,4.09, height 9.84
ACS712 [mm] "SOIC, 8-Leads, Body 4.90x3.90mm, Pitch 1.27mm, IPC Medium Density"
  oval 1.6x0.6 smd: 1(-2.8,1.905) 2(-2.8,0.635) 3(-2.8,-0.635) 4(-2.8,-1.905) 5(2.8,-1.905) 6(2.8,-0.635) 7(2.8,0.635) 8(2.8,1.905)
  silkscreen extent -2.92,-2.5 1.6,2.88, body extent -2,-2.5 2,2.5, height 1.75
AMS1117 [mm]
  rect 2.25x0.95 smd: 1(-3.052,2.29) 2(-3.052,0) 3(-3.052,-2.29)
  rect 2.15x3.35 smd: 4(2.925,0)
  silkscreen extent -3.05,-3.35 1.55,3.41, body extent -3.67,-3.25 3.33,3.25, height 1.85
C1206 [mm] "Chip Capacitor, Body 3.2x1.6mm, IPC High Density"
  rect 1.1x1.7 smd: 1(-1.35,0) 2(1.35,0)
  silkscreen extent -0.4,-0.75 0.4,0.75, body extent -1.7,-0.9 1.7,0.9, height 1.3
CAPAE220uF-63V [mm] "Aluminum Electrolytic Capacitor, Body 13.10x13.10x13.50mm, IPC Low Density"
  rect 6x2.6 smd: 1(-5.15,0) 2(5.15,0)
  silkscreen extent -6.6,-6.6 6.6,6.6, body extent -6.6,-6.6 6.6,6.6, height 13.5
CAPC0603 [mm]
  rect 1.2x1.1 smd: 1(-0.9,0) 2(0.9,0)
  silkscreen extent -1.73,-0.76 1.73,0.76, body extent -0.87,-0.48 0.89,0.48, height 0.6
D2PAK [mm] "D2-PAK, 3-Pads, Body 7.93x8.57mm (max), IPC Medium Density"
  rect 4.15x1.5 smd: 1(-6.25,2.54) 3(-6.25,-2.54)
  rect 8.8x10.5 smd: 2(3.95,0)
  silkscreen extent -6.37,-5.2 -0.85,5.2, body extent -3,-5.2 6.65,5.2, height 4.83
dpak [mm] "DPAK"
  rect 3x1.25 smd: 1(-6.7,2.58) 3(-6.7,-1.98)
  rect 9x8 smd: 2(0.09,0.3)
  silkscreen extent -6.82,-3.05 -4.12,3.71, body extent -6.74,-3.08 3.17,3.67, height 2.84
HDR2X25 [mm] "Connector; Header; 25x2 Position"
  rect 1.5x1.5 hole 0.9: 1(0,0)
  round 1.5 hole 0.9: 2(0,2.54) 3(2.54,0) 4(2.54,2.54) 5(5.08,0) 6(5.08,2.54) 7(7.62,0) 8(7.62,2.54) 9(10.16,0) 10(10.16,2.54) 11(12.7,0) 12(12.7,2.54) 13(15.24,0) 14(15.24,2.54) 15(17.78,0) 16(17.78,2.54) 17(20.32,0) 18(20.32,2.54) 19(22.86,0) 20(22.86,2.54) 21(25.4,0) 22(25.4,2.54) 23(27.94,0) 24(27.94,2.54) 25(30.48,0) 26(30.48,2.54) 27(33.02,0) 28(33.02,2.54) 29(35.56,0) 30(35.56,2.54) 31(38.1,0) 32(38.1,2.54) 33(40.64,0) 34(40.64,2.54) 35(43.18,0) 36(43.18,2.54) 37(45.72,0) 38(45.72,2.54) 39(48.26,0) 40(48.26,2.54) 41(50.8,0) 42(50.8,2.54) 43(53.34,0) 44(53.34,2.54) 45(55.88,0) 46(55.88,2.54) 47(58.42,0) 48(58.42,2.54) 49(60.96,0) 50(60.96,2.54)
  silkscreen extent -1.27,-1.27 62.23,3.81
HEADER1*3 [mm] "2.50mm Male Shrouded Header, 3p"
  rect 1.4x1.4 hole 0.9: 1(-2.5,0.6)
  round 1.4 hole 0.9: 2(0,0.6) 3(2.5,0.6)
  silkscreen extent -5,-2.45 5,2.45, body extent -5,-2.45 5,2.45, height 5.95
HEADER1*4 [mm] "2.50mm Male Shrouded Header, 4p"
  rect 1.4x1.4 hole 0.9: 1(-3.75,0.6)
  round 1.4 hole 0.9: 2(-1.25,0.6) 3(1.25,0.6) 4(3.75,0.6)
  silkscreen extent -6.25,-2.45 6.25,2.45, body extent -6.25,-2.45 6.25,2.45, height 5.95
LED [mm]
  rect 1.1x1.1 smd: 1(0.963,0.028) 2(-0.938,0.028)
  silkscreen extent -1.76,-0.76 1.74,0.81, body extent -0.82,-0.36 0.78,0.44, height 0.6
LM358 [mm] "SOIC, 8-Leads, Body 4.90x3.90mm, Pitch 1.27mm, IPC Medium Density"
  oval 1.85x0.75 smd: 1(-2.925,1.905) 2(-2.925,0.635) 3(-2.925,-0.635) 4(-2.925,-1.905) 5(2.925,-1.905) 6(2.925,-0.635) 7(2.925,0.635) 8(2.925,1.905)
  silkscreen extent -3.05,-2.5 1.6,2.95, body extent -3.25,-2.5 3.25,2.5, height 1.35
NPN [mm] "SOT23, 3-Leads, Body 2.90x2.45mm, Pitch 0.95mm, IPC Medium Density"
  rect 1x0.6 smd: 1(-1.2,0.95) 2(-1.2,-0.95) 3(1.2,0)
  silkscreen extent -1.32,-1.5 0.7,1.92, body extent -0.7,-1.5 0.7,1.5, height 1.1
QFP50P1600X1600X160-100N [mm]
  rect 1.475x0.3 smd: 1(-7.738,6) 2(-7.738,5.5) 3(-7.738,5) 4(-7.738,4.5) 5(-7.738,4) 6(-7.738,3.5) 7(-7.738,3) 8(-7.738,2.5) 9(-7.738,2) 10(-7.738,1.5) 11(-7.738,1) 12(-7.738,0.5) 13(-7.738,0) 14(-7.738,-0.5) 15(-7.738,-1) 16(-7.738,-1.5) 17(-7.738,-2) 18(-7.738,-2.5) 19(-7.738,-3) 20(-7.738,-3.5) 21(-7.738,-4) 22(-7.738,-4.5) 23(-7.738,-5) 24(-7.738,-5.5) 25(-7.738,-6) 51(7.738,-6) 52(7.738,-5.5) 53(7.738,-5) 54(7.738,-4.5) 55(7.738,-4) 56(7.738,-3.5) 57(7.738,-3) 58(7.738,-2.5) 59(7.738,-2) 60(7.738,-1.5) 61(7.738,-1) 62(7.738,-0.5) 63(7.738,0) 64(7.738,0.5) 65(7.738,1) 66(7.738,1.5) 67(7.738,2) 68(7.738,2.5) 69(7.738,3) 70(7.738,3.5) 71(7.738,4) 72(7.738,4.5) 73(7.738,5) 74(7.738,5.5) 75(7.738,6)
  rect 0.3x1.475 smd: 26(-6,-7.738) 27(-5.5,-7.738) 28(-5,-7.738) 29(-4.5,-7.738) 30(-4,-7.738) 31(-3.5,-7.738) 32(-3,-7.738) 33(-2.5,-7.738) 34(-2,-7.738) 35(-1.5,-7.738) 36(-1,-7.738) 37(-0.5,-7.738) 38(0,-7.738) 39(0.5,-7.738) 40(1,-7.738) 41(1.5,-7.738) 42(2,-7.738) 43(2.5,-7.738) 44(3,-7.738) 45(3.5,-7.738) 46(4,-7.738) 47(4.5,-7.738) 48(5,-7.738) 49(5.5,-7.738) 50(6,-7.738) 76(6,7.738) 77(5.5,7.738) 78(5,7.738) 79(4.5,7.738) 80(4,7.738) 81(3.5,7.738) 82(3,7.738) 83(2.5,7.738) 84(2,7.738) 85(1.5,7.738) 86(1,7.738) 87(0.5,7.738) 88(0,7.738) 89(-0.5,7.738) 90(-1,7.738) 91(-1.5,7.738) 92(-2,7.738) 93(-2.5,7.738) 94(-3,7.738) 95(-3.5,7.738) 96(-4,7.738) 97(-4.5,7.738) 98(-5,7.738) 99(-5.5,7.738) 100(-6,7.738)
  silkscreen extent -8.35,-6.65 6.65,6.87, body extent -8,-8 8,8, height 1.6
RES1206 [mm]
  rect 1.2x1.45 smd: 1(1.5,0)
  rect 1.2x1.55 smd: 2(-1.5,0)
  silkscreen extent -2.3,-1 2.3,1, body extent -1.57,-0.67 1.57,0.67, height 0.6
"RES 0R" [mm]
  rect 1.1x1.1 smd: 1(-0.95,0) 2(0.95,0)
  Top Layer region: 0.4,-0.55 0.95,0 0.4,0.55 -0.15,0
  Top Layer region: -0.403,0 0.147,-0.55 -0.403,-0.55
  Top Layer region: 0.147,0.55 -0.403,0 -0.403,0.55
  silkscreen extent -1.73,-0.79 1.73,0.79, body extent -0.85,-0.48 0.85,0.48, height 0.6
RESC0603 [mm]
  rect 1.1x1.1 smd: 1(-0.95,0) 2(0.95,0)
  silkscreen extent -1.73,-0.79 1.73,0.79, body extent -0.8,-0.4 0.8,0.4, height 0.45
SOT-23_N [mm] "SOT23, 3-Leads, Body 2.9x1.3mm, Pitch 0.95mm, Lead Span 2.5mm, IPC Medium Density"
  rect 1.15x0.6 smd: 1(-1.125,0.95) 2(-1.125,-0.95) 3(1.125,0)
  silkscreen extent -1.25,-1.5 0.7,1.92, body extent -0.7,-1.5 0.7,1.5, height 1.1
SWITCH-PB4 [mm]
  rect 1.5x2 smd: 1(-1.627,-2.5) 1(-1.627,2.5) 2(1.627,-2.5) 2(1.627,2.5)
  silkscreen extent -2.64,-4.4 2.69,3.72, body extent -2.39,-2.5 2.44,2.45, height 2
"terminal block - 2828372" [mm] "terminal block 2 pin"
  round 1.65 hole 1.1: 1(0,0) 2(5.08,0)
  silkscreen extent -2.54,-4.1 7.62,4.1, body extent -2.51,-4.11 8.25,4.09, height 9.84
"terminal block - battery - 2828372 -" [mm] "terminal block 2 pin"
  round 1.65 hole 1.1: 1(0.02,22.92) 2(0.02,17.84) 3(0.01,12.73) 4(0.01,7.65) 5(0.01,2.57) 6(0.01,-2.51) 7(0,-7.62) 8(0,-12.7) 9(0,-17.75) 10(0,-22.83)
  silkscreen extent -4.11,-25.4 4.12,25.46, body extent -4.11,-26 4.11,25.43, height 9.84
XTAL [mm]
  oval 1.5x1.3 hole 0.8: 1(0,2.44) 2(0,-2.44)
  silkscreen extent -2.16,-5.71 2.16,5.71, body extent -2.25,-5.75 2.25,5.75, height 3.56
ZENER [mm] "MELF Diode, 2-Leads, Body 3.50x1.47mm, IPC Medium Density"
  rect 1.1x1.8 smd: 1(-1.725,0) 2(1.725,0)
  silkscreen extent -0.8,-0.87 0.8,0.8, body extent -1.86,-0.85 1.86,0.85, height 1.69